# Altium PCB PCB1.PcbDoc
Units mm, origin at the board's own origin, x right, y up, seen from the top; angles counter-clockwise.
Board outline 47.88 x 19.3 mm, 2 copper layers (Top Layer, Bottom Layer); 25 components, 41 nets, 143 pads, 22 vias.
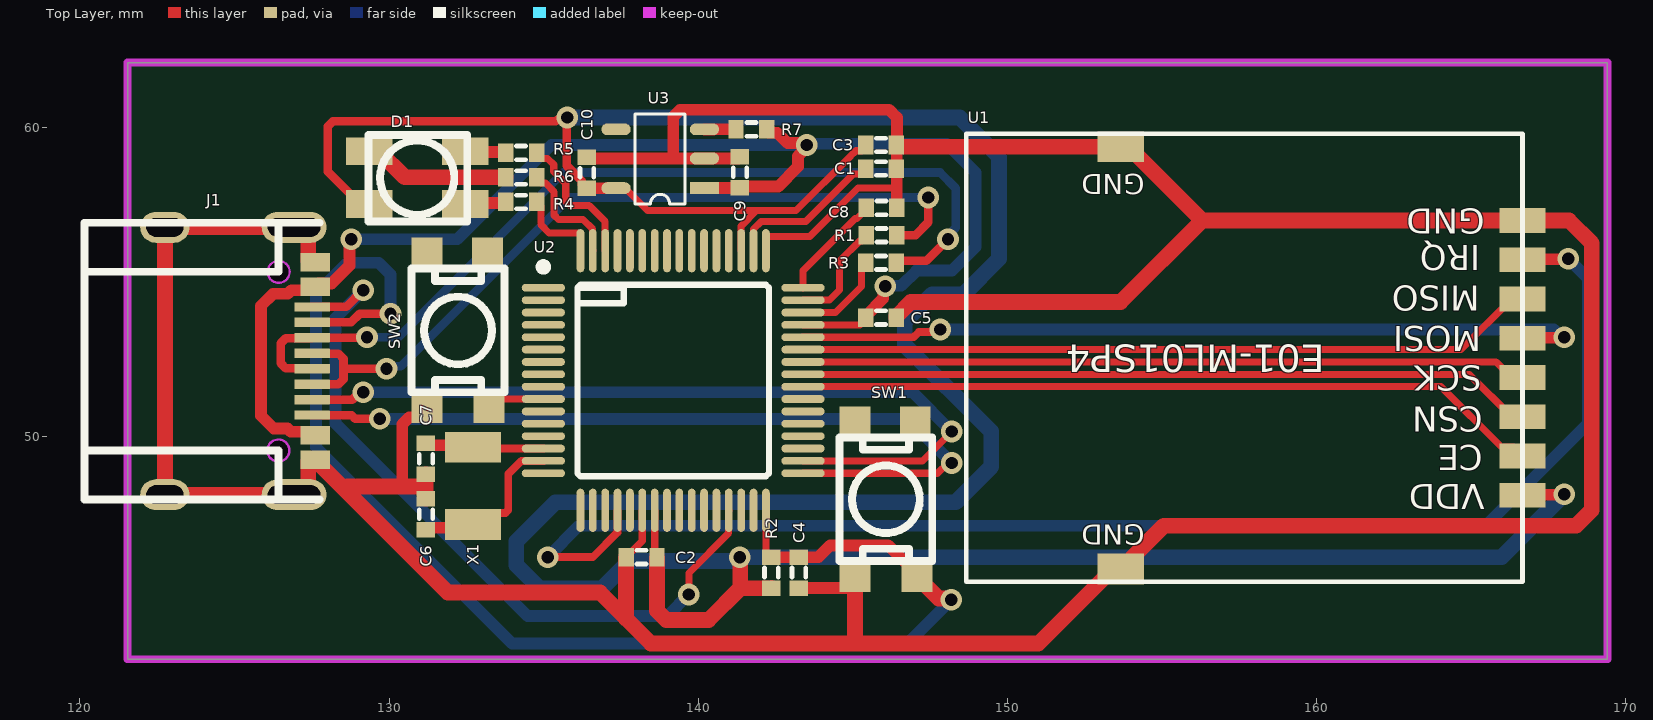
[diagram p0: Top Layer view]
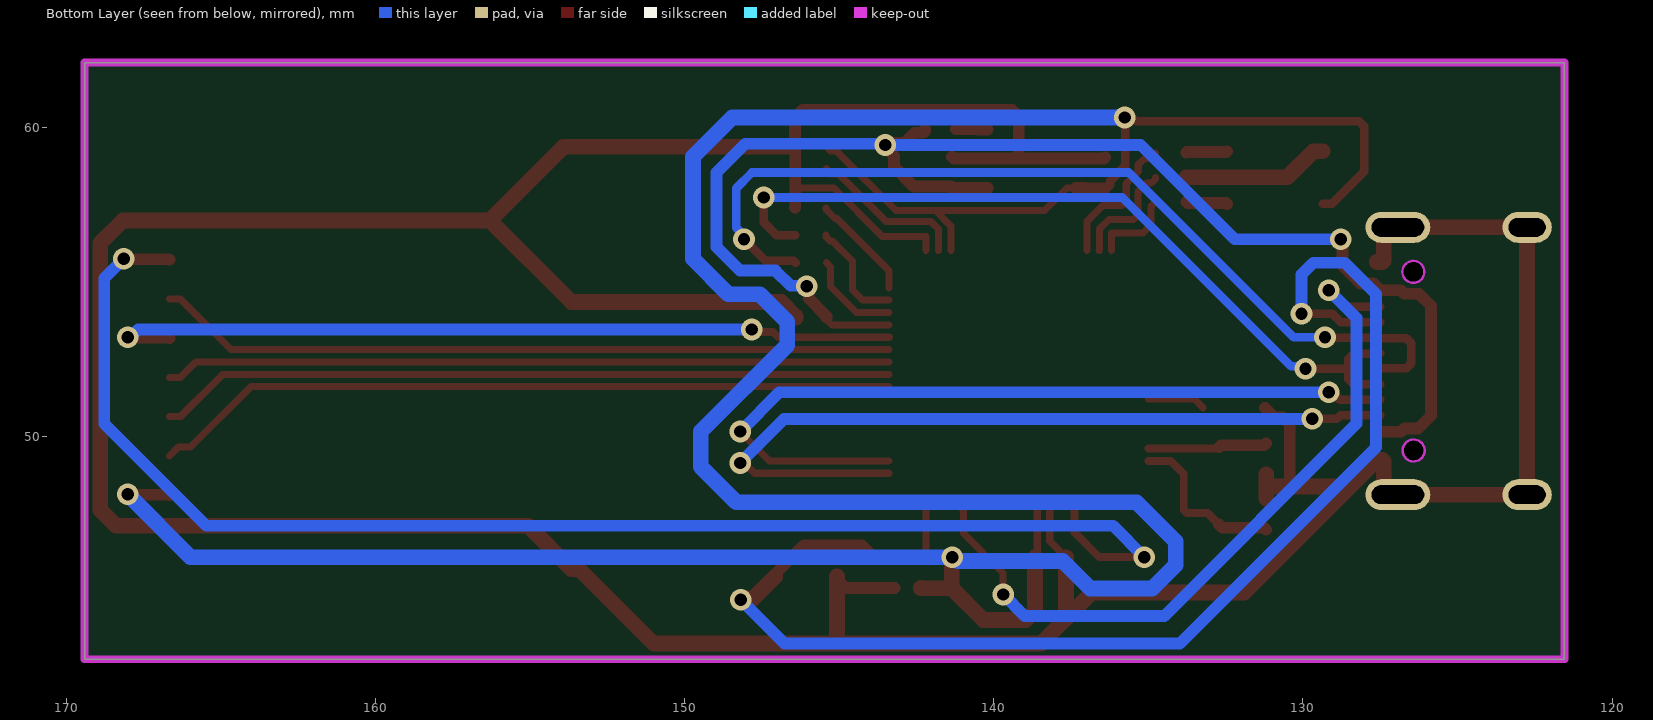
[diagram p1: Bottom Layer view, seen from below]
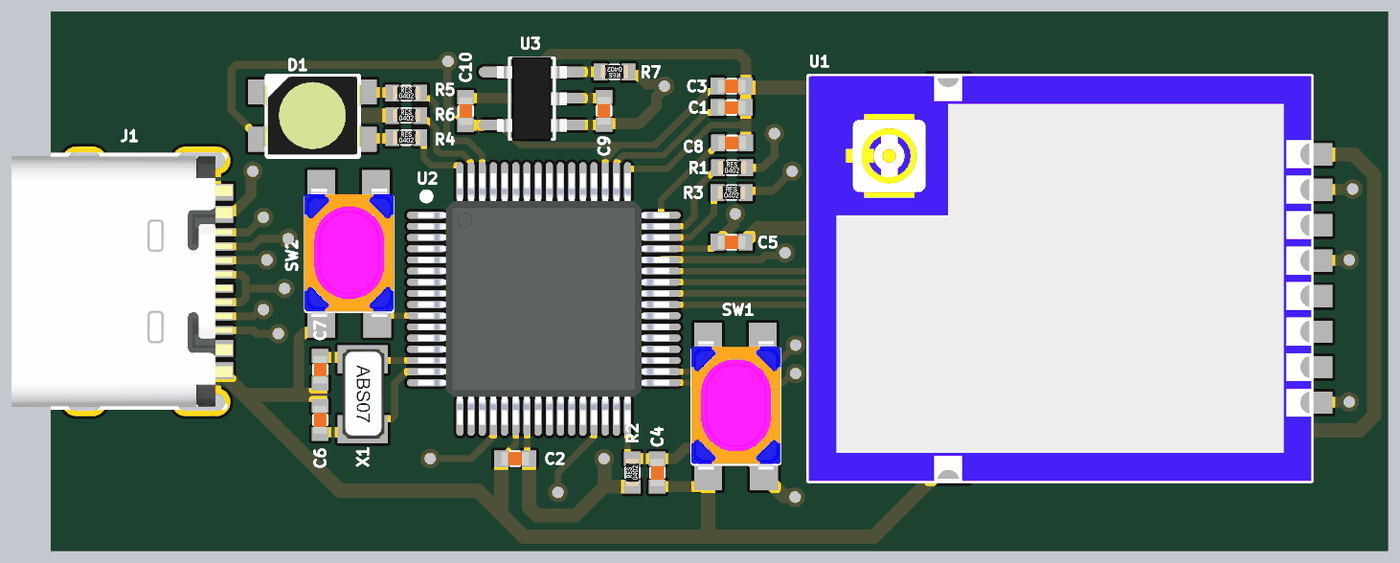
[diagram p2: 3D render of the assembled board from above, using the file's embedded part models]

## Layer stack, top to bottom
Top Solder: solder mask 0.0102, Solder Resist, Dk 3.5
Top Layer: signal copper 0.0356
Dielectric 1: dielectric 0.32, FR-4, Dk 4.8
Bottom Layer: signal copper 0.0356
Bottom Solder: solder mask 0.0102, Solder Resist, Dk 3.5

## Board outline
121.539,42.799 121.539,62.103 169.418,62.103 169.418,42.799

## Design rules (kind name [scope] priority, off if disabled: settings)
Clearance [All] p1: gap=0.127 ignorepadtopadclearanceinfootprint=FALSE
PolygonConnect [All] p1: connectstyle=Relief reliefconductorwidth=0.254 reliefentries=4 polygonreliefangle="90 Angle" airgapwidth=0.254
RoutingVias [All] p1: holewidth=0.711 width=1.27 viastyle="Through Hole" minholewidth=0.4 minwidth=0.7 maxholewidth=0.711 maxwidth=1.27
SolderMaskExpansion [All] p1: expansion=0.102 istentingtop=FALSE
Width [All] p1: maxlimit=0.508 minlimit=0.178 preferedwidth=0.254
30 further rules are at their usual default settings.

## Classes and differential pairs
component class U_Power: C9 C10 R7 U3
net class PB_ADC0_CH[0..4]: PB_ADC0_CH0 PB_ADC0_CH1 PB_ADC0_CH2 PB_ADC0_CH3 PB_ADC0_CH4
component class U_NRF24L01: U1
component class U_M032: C1 C2 C3 C4 C5 C6 C7 C8 R1 R2 R3 SW1 U2 X1
component class Sheet1: D1 J1 R4 R5 R6 SW2

## Components (designator, comment, footprint, x,y, rotation, side; value= is the part's Value field where it differs from the comment)
C1 "Cap" CAP_0402 145.415,58.674 r0 top value=1uF
C2 "Cap" CAP_0402 138.668,46.101 r180 top value=0.1uF
C3 "Cap" CAP_0402 145.415,59.436 r0 top value=0.1uF
C4 "Cap" CAP_0402 143.256,46.101 r270 top value=0.1uf
C5 "Cap" CAP_0402 145.415,53.848 r0 top value=1uF
C6 "Cap" CAP_0402 131.191,46.99 r90 top value=20pF
C7 "Cap" CAP_0402 131.191,49.784 r270 top value=20pF
C8 "Cap" CAP_0402 145.431,57.404 r0 top value=1uF
C9 "Cap" CAP_0402 141.351,58.055 r90 top value=1uf
C10 "Cap" CAP_0402 136.398,58.039 r90 top value=1uf
D1 "RGB" 1411_LED 129.361,57.531 r180 top
J1 "USB TYPE C" USBC-SMD16F 122.748,56.772 r270 top
R1 "Res" RES_0402 145.431,56.515 r0 top value=27
R2 "Res" RES_0402 142.367,45.101 r90 top value=10K
R3 "Res" RES_0402 145.415,55.626 r0 top value=27
R4 "Res" RES_0402 133.773,57.595 r0 top value=1K
R5 "Res" RES_0402 133.773,59.183 r0 top value=1K
R6 "Res" RES_0402 133.773,58.388 r0 top value=1K
R7 "Res" RES_0402 142.224,59.944 r180 top value=100K
SW1 "SPST" "TACK-SW_SMD 2P 4x3mm_2" 147.574,45.974 r180 top
SW2 "SPST" "TACK-SW_SMD 2P 4x3mm_2" 133.731,51.435 r180 top
U1 "NRF24L01" NRF24L01P+PA+LNA+IPX 148.67,45.3 r90 top
U2 "M032SG8AE" MCU_LQFP_64_7x7 139.192,51.816 r0 top
U3 "AP2112K-3.3TRG1" SOT23-5 139.573,57.531 r180 top
X1 "Xtal" X3215 132.715,49.657 r270 top value=32.768KHz

## Footprints (in the part's own frame and the unit in brackets; to place one, negate y for a bottom-side part, rotate by r counter-clockwise, add the part's x,y. Pads: shape width x height; smd on the part's side, far side on the other; paste and mask are expansions set on the pad)
1411_LED [mm]
  rect 1.5x0.9 smd: 1(0,0) 2(0,-1.7) 3(-3.1,0) 4(-3.1,-1.7)
  silkscreen extent -3.17,-2.23 0.03,0.57, body extent -3.3,-2.25 0.2,0.55, height 1.9
CAP_0402 [mm]
  rect 0.5x0.6 smd: 1(0,0) 2(1,0)
  silkscreen extent 0.35,-0.22 0.65,0.22, body extent 0,-0.25 1,0.25, height 0.48
MCU_LQFP_64_7x7 [mm]
  oval 1.4x0.25 smd: 1(-4.2,3) 2(-4.2,2.6) 3(-4.2,2.2) 4(-4.2,1.8) 5(-4.2,1.4) 6(-4.2,1) 7(-4.2,0.6) 8(-4.2,0.2) 9(-4.2,-0.2) 10(-4.2,-0.6) 11(-4.2,-1) 12(-4.2,-1.4) 13(-4.2,-1.8) 14(-4.2,-2.2) 15(-4.2,-2.6) 16(-4.2,-3) 33(4.2,-3) 34(4.2,-2.6) 35(4.2,-2.2) 36(4.2,-1.8) 37(4.2,-1.4) 38(4.2,-1) 39(4.2,-0.6) 40(4.2,-0.2) 41(4.2,0.2) 42(4.2,0.6) 43(4.2,1) 44(4.2,1.4) 45(4.2,1.8) 46(4.2,2.2) 47(4.2,2.6) 48(4.2,3)
  oval 0.25x1.4 smd: 17(-3,-4.2) 18(-2.6,-4.2) 19(-2.2,-4.2) 20(-1.8,-4.2) 21(-1.4,-4.2) 22(-1,-4.2) 23(-0.6,-4.2) 24(-0.2,-4.2) 25(0.2,-4.2) 26(0.6,-4.2) 27(1,-4.2) 28(1.4,-4.2) 29(1.8,-4.2) 30(2.2,-4.2) 31(2.6,-4.2) 32(3,-4.2) 49(3,4.2) 50(2.6,4.2) 51(2.2,4.2) 52(1.8,4.2) 53(1.4,4.2) 54(1,4.2) 55(0.6,4.2) 56(0.2,4.2) 57(-0.2,4.2) 58(-0.6,4.2) 59(-1,4.2) 60(-1.4,4.2) 61(-1.8,4.2) 62(-2.2,4.2) 63(-2.6,4.2) 64(-3,4.2)
  silkscreen extent -4.32,-3.1 3.1,3.8, body extent -4.5,-4.5 4.5,4.5, height 1.55
NRF24L01P+PA+LNA+IPX [mm]
  rect 0.8x1.5 smd: 1(2.805,-18) 2(4.075,-18) 3(5.345,-18) 4(6.615,-18) 5(7.885,-18) 6(9.155,-18) 7(10.425,-18) 8(11.695,-18)
  rect 1x1.5 smd: 9(14.08,-5) 10(0.42,-5)
  silkscreen extent 0,-18 14.5,0, body extent 0,-18 14.5,0, height 2.6
RES_0402 [mm]
  rect 0.5x0.6 smd: 1(0,0) 2(1,0)
  silkscreen extent 0.35,-0.22 0.65,0.22, body extent 0,-0.25 1,0.25, height 0.35
SOT23-5 [mm]
  rect 0.95x0.38 smd: 1(-0.63,-0.51)
  oval 0.95x0.38 smd: 2(-0.63,-1.47) 3(-0.63,-2.41) 4(2.23,-2.41) 5(2.23,-0.51)
  silkscreen extent 0,-2.91 1.61,0, body extent -0.44,-2.95 2.06,0.05, height 1.09
"TACK-SW_SMD 2P 4x3mm_2" [mm]
  rect 1x1 smd: 1(0.5,0.5) 1(0.55,-4.5) 2(2.5,0.5) 2(2.5,-4.5)
  silkscreen extent 0,-4 3,0, body extent -0.1,-4.33 3.1,0.26, height 2.5
USBC-SMD16F [mm]
  rect 0.6x0.95 smd: 1(1.125,4.86) 2(1.925,4.86) 11(6.725,4.86) 12(7.525,4.86)
  rect 0.3x1.15 smd: 3(2.575,4.76) 4(3.075,4.76) 5(3.575,4.76) 6(4.075,4.76) 7(4.575,4.76) 8(5.075,4.76) 9(5.575,4.76) 10(6.075,4.76)
  oval 1x2.1 hole 0.6 slot 1.7 at 90 deg: ""(0,4.18) ""(8.65,4.18)
  oval 1x1.6 hole 0.6 slot 1.2 at 90 deg: ""(0,0) ""(8.65,0)
  Keep-Out Layer board cut-out: 6.864,3.67 6.891,3.534 6.969,3.419 7.084,3.341 7.22,3.314 7.22,3.314 7.356,3.341 7.471,3.419 7.549,3.534 7.576,3.67 7.576,3.67 7.549,3.806 7.471,3.921 7.356,3.999 7.22,4.026 7.22,4.026 7.084,3.999 6.969,3.921 6.891,3.806 6.864,3.67
  Keep-Out Layer board cut-out: 1.44,3.324 1.304,3.351 1.189,3.429 1.111,3.544 1.084,3.68 1.084,3.68 1.111,3.816 1.189,3.931 1.304,4.009 1.44,4.036 1.44,4.036 1.576,4.009 1.691,3.931 1.769,3.816 1.796,3.68 1.796,3.68 1.769,3.544 1.691,3.429 1.576,3.351 1.44,3.324
  Keep-Out Layer circle w0.076: c1.44,3.68 r0.356
  Keep-Out Layer circle w0.076: c7.22,3.67 r0.356
  silkscreen extent -0.15,-2.6 8.8,5, body extent -0.15,-2.6 8.8,5.3, height 3.16
X3215 [mm]
  rect 1x1.8 smd: 1(0,0) 2(2.5,0)
  body extent -0.38,-0.74 2.84,0.78, height 0.91

## Part data
D1: library part LED_1411
J1: "USB Shielded I/O Receptacle; Type C; Right Angle; Surface Mount; Gold over Nickel", Case/Package=0101, Current Rating=5A, Flammability Rating="UL94 V-0", Insulation Color=Black, Manufacturer=Molex, Manufacturer Part Number=105450-0101, Max Operating Temperature=85°C, Min Operating Temperature=-30°C, Supplier Part Number 1=WM12856DKR-ND, Category=Connectors, ComponentLink1Description=http://www.farnell.com/datasheets/2801634.pdf?src-supplier=Farnell, ComponentLink1URL=http://www.farnell.com/datasheets/2801634.pdf?src-supplier=Farnell, ComponentLink2Description=http://www.farnell.com/datasheets/2672741.pdf?src-supplier=Newark, ComponentLink2URL=http://www.farnell.com/datasheets/2672741.pdf?src-supplier=Newark, ComponentLink3Description=http://www.farnell.com/datasheets/2015275.pdf?src-supplier=Element14, ComponentLink3URL=http://www.farnell.com/datasheets/2015275.pdf?src-supplier=Element14, ComponentLink4Description=https://www.molex.com/pdm_docs/ps/PS-105448-001.pdf?src-supplier=Digi-Key, ComponentLink4URL=https://www.molex.com/pdm_docs/ps/PS-105448-001.pdf?src-supplier=Digi-Key, ComponentLink5Description=http://www.farnell.com/datasheets/2801634.pdf?src-supplier=Newark, ComponentLink5URL=http://www.farnell.com/datasheets/2801634.pdf?src-supplier=Newark, ComponentLink6Description=https://www.molex.com/pdm_docs/sd/1054500101_sd.pdf?src-supplier=Digi-Key, ComponentLink6URL=https://www.molex.com/pdm_docs/sd/1054500101_sd.pdf?src-supplier=Digi-Key, ComponentLink7Description=http://www.farnell.com/datasheets/2801634.pdf?src-supplier=Element14, ComponentLink7URL=http://www.farnell.com/datasheets/2801634.pdf?src-supplier=Element14, ComponentLink8Description=http://www.literature.molex.com/SQLImages/kelmscott/Molex/PDF_Images/987651-4081.PDF?src-supplier=Avnet, ComponentLink8URL=http://www.literature.molex.com/SQLImages/kelmscott/Molex/PDF_Images/987651-4081.PDF?src-supplier=Avnet, ComponentLink9Description=http://www.literature.molex.com/SQLImages/kelmscott/Molex/PDF_Images/987651-4081.PDF?src-supplier=Avnet+Asia, ComponentLink9URL=http://www.literature.molex.com/SQLImages/kelmscott/Molex/PDF_Images/987651-4081.PDF?src-supplier=Avnet+Asia, Connector Type=USB, Contact Material="Copper Alloy", Contact Plating=Gold, Features=Shielded, Gender=Receptacle, Housing Material=Thermoplastic, Length=8.94mm, Mating Cycles=10000, Mount="Surface Mount,Through Hole,Horizontal", Number of Contacts=24, Number of Pins=24, Number of Ports=1, Number of Terminals=24, Orientation="Right Angle", Packaging="Tape and Reel", Pitch=0.5mm, Pricing 1="1=2.15000, 10=1.94900, 25=1.82960, 50=1.75000, 100=1.67050, 250=1.51140, 500=1.39208 (USD)", REACH SVHC=Unknown, RoHS=Yes, Shielding=Shielded, Stock 1=21711, Supplier 1=Digi-Key, Termination=Solder, USB Standard="USB 3.1"
SW1 SW2: library part Switch_Button1
U1: library part NRF24L01_module
U3: "IC REG LINEAR 3.3V 600MA SOT23-5", Case/Package=SOT-23-5, Dropout Voltage=250mV, Manufacturer=Diodes, Max Input Voltage=6V, Max Operating Temperature=85°C, Max Output Current=600mA, Min Input Voltage=2.5V, Min Operating Temperature=-40°C, Output Voltage=3.3V, Package Quantity=1, Quiescent Current=55uA, Supplier Part Number 1=AP2112K-3.3TRG1DICT-ND, Accuracy=1.5%, Category="Voltage Regulators - Linear", ComponentLink1Description=https://datasheet.ciiva.com/29569/ap2112-29569919.pdf?src-supplier=Digi-Key, ComponentLink1URL=https://datasheet.ciiva.com/29569/ap2112-29569919.pdf?src-supplier=Digi-Key, ComponentLink2Description=https://datasheet.ciiva.com/30016/ap2112-30016792.pdf?src-supplier=Avnet, ComponentLink2URL=https://datasheet.ciiva.com/30016/ap2112-30016792.pdf?src-supplier=Avnet, ComponentLink3Description=https://datasheet.ciiva.com/29569/ap2112-29569917.pdf?src-supplier=Digi-Key, ComponentLink3URL=https://datasheet.ciiva.com/29569/ap2112-29569917.pdf?src-supplier=Digi-Key, ComponentLink4Description=https://datasheet.ciiva.com/29569/ap2112-29569918.pdf?src-supplier=Digi-Key, ComponentLink4URL=https://datasheet.ciiva.com/29569/ap2112-29569918.pdf?src-supplier=Digi-Key, Height=1.3mm, Lead Free="Lead Free", Length=3.1mm, Manufacturer Part Number=AP2112K-3.3TRG1, Mount="Surface Mount", Number of Outputs=1, Number of Pins=5, Number of Regulators=1, Output Current=600mA, Output Type=Fixed, Packaging="Tape and Reel", Polarity=Positive, Pricing 1="1=0.47000, 10=0.35500, 25=0.32000, 100=0.17450, 250=0.16872, 500=0.15126, 1000=0.11636 (USD)", RoHS=Yes, Stock 1=54786, Supplier 1=Digi-Key, Width=1.7mm

## Via types
v1: diameter 0.7, hole 0.4, Top Layer to Bottom Layer, tented both sides, 22 vias

## Nets (pads, with @x,y where several pads share a name; then routed paths per layer and width w, separated by ;. In a path a pad name is that pad's centre, name@x,y a point inside that pad or via, vN(x,y) a via of type N, cw(c..) or ccw(c..) an arc to the next point about the centre after c; other vN are vias at no path point)
CE: U1.2 U2.40 | length 24.2
  Top Layer w0.229: U2.40 164.03,51.616 165.985,49.661 166.384,49.661 U1.2
FP0_ICE_DAT: J1.10 U2.33 | length 26.3
  Top Layer w0.229: U2.33 147.748,48.816 148.081,49.149 v1(148.209,49.149)
  Top Layer w0.279: J1.10 128.786,50.697 128.909,50.573 v1(129.694,50.573)
  Bottom Layer w0.381: v1(129.694,50.573) 146.785,50.573 v1(148.209,49.149)
FP1_ICE_CLK: J1.9 U2.34 | length 26.5
  Top Layer w0.229: U2.34 147.26,49.216 v1(148.209,50.165)
  Top Layer w0.279: J1.9 128.807,51.197 129.045,51.435 v1(129.159,51.435)
  Bottom Layer w0.381: v1(129.159,51.435) 146.939,51.435 v1(148.209,50.165)
GND: C1.2 C2.2 C3.2 C4.2 C5.2 C6.2 C7.2 C8.2 C9.2 C10.2 J1. J1.1 J1.12 SW1.2@145.074,45.474 SW2.2@131.231,50.935 U1.8 U1.9 U1.10 U2.22 U2.49 U3.2 | length 145.8
  Top Layer w0.229: C2.2@137.854,46.287 138.192,46.625 U2.22 ; U2.49 142.192,56.467 142.202,56.477 143.612,56.477 145.175,58.039 146.423,58.039
  Top Layer w0.381: 130.589,48.387 130.429,48.547 130.429,50.402 130.652,50.625 130.921,50.625 SW2.2@131.231,50.935 ; C10.2 136.436,59.001 139.192,59.001 ; C9.2 141.297,59.001 U3.2 139.192,59.001 ; C4.2@143.206,45.101 144.796,45.101 SW1.2@145.074,45.379 ; C1.2 C1.2@146.423,58.674 ; C8.2 146.423,57.412 146.423,58.039 C1.2@146.423,58.674 ; 139.192,59.001 139.192,60.356 139.415,60.579 146.177,60.579 146.431,60.325 146.431,59.452 C3.2 146.423,59.428 C1.2@146.423,58.674
  Top Layer w0.508: J1.1 127.433,55.647 127.387,55.693 127.387,56.545 127.16,56.772 126.928,56.772 122.748,56.772 122.748,48.122 126.928,48.122 127.16,48.122 127.387,48.349 127.387,49.201 127.433,49.247 127.783,49.247 127.829,49.201 127.829,49.026 128.556,48.299 131.897,44.958 136.823,44.958 137.668,44.113 ; 128.643,48.387 130.589,48.387 131.191,48.387 ; C6.2 131.191,48.387 ; C7.2 131.191,48.387 ; C2.2 137.668,44.113 ; SW1.2@145.074,45.474 145.074,45.379 145.074,43.394 145.161,43.307 ; C5.2 146.415,53.89 146.881,54.356 153.666,54.356 156.305,56.995 ; C3.2@146.431,59.452 146.503,59.38 U1.9 153.92,59.38 156.305,56.995 ; 137.668,44.113 138.474,43.307 145.161,43.307 ; 145.161,43.307 151.007,43.307 153.42,45.72 U1.10 155.067,47.117 168.402,47.117 168.91,47.625 168.91,56.261 168.176,56.995 U1.8 156.305,56.995
INT: U1.7 U2.20 | length 45.8
  Top Layer w0.254: v1(135.128,46.101) 136.588,46.101 137.39,46.903 U2.20 U2.20
  Top Layer w0.381: U1.7 166.684,55.739 168.134,55.739 v1(168.148,55.753)
  Bottom Layer w0.381: v1(135.128,46.101) 136.144,47.117 165.481,47.117 168.783,50.419 168.783,55.118 v1(168.148,55.753)
LDO_CAP: C1.1 U2.50 | length 5.2
  Top Layer w0.229: U2.50 141.796,56.02 141.796,56.713 142.04,56.957 143.482,56.957 145.018,58.493 145.279,58.493 145.415,58.629 C1.1
LED_B: R6.2 U2.63 | length 3.7
  Top Layer w0.229: R6.2 134.773,58.338 134.909,58.202 135.057,58.202 135.343,57.916 135.343,57.161 135.477,57.027 136.274,57.027 136.588,56.713 136.588,56.02 U2.63
LED_G: R5.2 U2.62 | length 4.6
  Top Layer w0.229: R5.2 134.773,59.133 134.909,58.997 135.131,58.997 135.329,58.799 135.329,58.578 135.717,58.189 135.717,57.613 135.851,57.48 136.475,57.48 136.992,56.962 U2.62
LED_R: R4.2 U2.64 | length 2.8
  Top Layer w0.229: R4.2 134.909,57.459 134.909,56.861 135.176,56.594 136.182,56.594 136.192,56.584 U2.64
MCU_USB_D+: R1.1 U2.47 | length 3.5
  Top Layer w0.229: U2.47 143.396,54.42 144.25,54.42 144.577,54.747 144.577,55.679 145.227,56.329 145.295,56.329 145.431,56.465 R1.1
MCU_USB_D-: R3.1 U2.46 | length 3.1
  Top Layer w0.229: U2.46 143.396,54.02 144.444,54.02 145.279,54.855 145.279,55.49 R3.1
MCU_VDD: C2.1 C3.1 C10.1 D1.1 R2.1 U1.1 U2.23 U2.51 U3.5 | length 115.5
  Top Layer w0.229: U3.5 137.628,58.041 138.356,57.313 141.893,57.313 ; U2.23 138.596,47.612 138.596,46.173 C2.1 ; U2.51 141.392,56.812 141.893,57.313 ; C3.1 145.415,59.386 145.279,59.25 145.102,59.25 145.067,59.215 145.065,59.215 144.924,59.074 144.924,59.072 143.165,57.313 141.893,57.313
  Top Layer w0.279: D1.1 129.061,57.531 128.016,58.576 128.016,60.034 128.18,60.198 135.389,60.198 135.436,60.245 135.683,60.245 v1(135.763,60.325) ; v1@135.746,60.308 135.746,58.763 136.238,58.272 136.238,58.149 136.348,58.039 C10.1
  Top Layer w0.381: C10.1 137.057,58.039 137.059,58.041 U3.5 ; U1.1 166.684,48.119 168.007,48.119 v1(168.021,48.133)
  Top Layer w0.508: C2.1 138.668,44.367 138.966,44.069 140.335,44.069 141.363,45.097 ; v1(141.351,46.101) 141.363,46.089 141.363,45.097 ; R2.1 142.363,45.097 141.363,45.097
  Bottom Layer w0.508: v1(135.763,60.325) 148.463,60.325 149.733,59.055 149.733,55.753 148.59,54.61 147.574,54.61 146.685,53.721 146.685,52.959 149.479,50.165 149.479,49.022 148.336,47.879 135.382,47.879 134.112,46.609 134.112,45.847 134.874,45.085 136.88,45.085 137.769,45.974 141.172,45.974 141.299,46.101 v1(141.351,46.101) 165.989,46.101 v1(168.021,48.133)
NetD1_2: D1.2 R6.1 | length 4.8
  Top Layer w0.508: D1.2 129.661,59.231 130.504,58.388 R6.1
NetD1_3: D1.3 R4.1 | length 1.3
  Top Layer w0.381: D1.3 132.493,57.563 133.741,57.563 R4.1
NetD1_4: D1.4 R5.1 | length 1.3
  Top Layer w0.381: D1.4 132.485,59.207 133.749,59.207 R5.1
NetR7_2: R7.2 U3.3 | length 1
  Top Layer w0.381: U3.3 140.487,59.941 140.49,59.944 R7.2
nRESET: C4.1 J1.4 R2.2 SW1.1@147.074,45.474 U2.32 | length 43.8
  Top Layer w0.229: R2.2@142.192,46.237 U2.32
  Top Layer w0.279: J1.4 128.771,53.697 129.049,53.975 v1(130.048,53.975)
  Top Layer w0.381: R2.2 C4.1 143.891,46.101 144.272,46.482 146.145,46.482 SW1.1@147.161,45.466
  Top Layer w0.508: SW1.1@147.074,45.474 147.787,44.761 148.152,44.761 v1(148.189,44.724)
  Bottom Layer w0.381: v1(130.048,53.975) 130.048,55.245 129.667,55.626 128.651,55.626 127.635,54.61 127.635,49.657 133.985,43.307 146.772,43.307 v1(148.189,44.724)
PA0_UART0_RXD: U2.30
PA1_UART0_TXD: J1.3 U2.29 | length 24.1
  Top Layer w0.229: v1(139.7,44.895) 139.7,45.593 140.988,46.881 140.988,47.612 U2.29
  Top Layer w0.279: J1.3 128.611,54.197 129.151,54.737 v1(129.159,54.737)
  Bottom Layer w0.381: v1(129.159,54.737) 128.27,53.848 128.27,50.416 134.49,44.196 139.001,44.196 v1(139.7,44.895)
PA4_I2C0_SCL: U2.26
PA5_I2C0_SDA: U2.25
PA6_INT0: U2.21
PA8_IO_V33EN: U2.11
PA9_IO_BTM: SW2.1@133.231,50.935 U2.10 | length 1.9
  Top Layer w0.229: SW2.1@133.231,50.935 133.512,51.216 U2.10
PB14_IO_CHRG: U2.54
PB15_IO_STDBY: U2.53
PB_ADC0_CH0: U2.7
PB_ADC0_CH1: U2.6
PB_ADC0_CH2: U2.5
PB_ADC0_CH3: U2.4
PB_ADC0_CH4: U2.3
PD0_SPI0_MOSI: U1.5 U2.44 | length 26.2
  Top Layer w0.254: U2.44 146.97,53.216 147.136,53.382 147.743,53.382 v1(147.828,53.467)
  Top Layer w0.381: U1.5 166.684,53.199 168.007,53.199 v1(168.021,53.213)
  Bottom Layer w0.381: v1(147.828,53.467) 167.681,53.467 167.935,53.213 v1(168.021,53.213)
PD1_SPI0_MISO: U1.6 U2.43 | length 24
  Top Layer w0.229: U2.43 164.681,52.816 166.32,54.455 U1.6
PD2_SPI0_CLK: U1.4 U2.42 | length 23.5
  Top Layer w0.229: U2.42 165.819,52.416 166.32,51.915 U1.4
PD3_SPI0_SS: U1.3 U2.41 | length 23.8
  Top Layer w0.229: U2.41 164.949,52.016 166.32,50.645 U1.3
PF4_X32_OUT: C6.1 U2.15 X1.2 | length 5.4
  Top Layer w0.254: X1.2 133.088,47.53 133.763,47.53 133.858,47.625 133.858,48.793 134.279,49.214 U2.15 U2.15
  Top Layer w0.381: C6.1 131.25,47.049 132.607,47.049 X1.2
PF5_X32_IN: C7.1 U2.14 X1.1 | length 3.9
  Top Layer w0.254: X1.1 132.756,49.616 U2.14
  Top Layer w0.381: C7.1 131.25,49.725 132.647,49.725 X1.1
USB_CAP: C8.1 U2.48 | length 3.5
  Top Layer w0.229: U2.48 143.392,55.367 145.081,57.056 145.133,57.056 145.431,57.354 C8.1
USB_D+: J1.6 J1.8 R1.2 | length 26
  Top Layer w0.279: J1.8 128.36,51.697 128.524,51.861 128.524,52.192 ; J1.6 127.518,52.687 128.36,52.687 128.524,52.523 128.524,52.192 ; v1(129.916,52.192) 128.524,52.192 ; R1.2 147.029,56.515 147.447,56.933 v1(147.447,57.738)
  Bottom Layer w0.279: v1(129.916,52.192) 129.996,52.272 130.377,52.272 135.843,57.738 v1(147.447,57.738)
USB_D-: J1.5 J1.7 R3.2 | length 29.8
  Top Layer w0.279: J1.7 127.498,52.207 126.656,52.207 126.492,52.371 126.492,53.023 126.656,53.187 127.498,53.187 J1.5 127.516,53.205 129.278,53.205 v1(129.286,53.213) ; R3.2 146.479,55.689 147.383,55.689 v1(148.082,56.388)
  Bottom Layer w0.279: v1(129.286,53.213) 130.302,53.213 135.636,58.547 147.828,58.547 148.336,58.039 148.336,56.756 148.082,56.502 v1(148.082,56.388)
USB_VBUS: C5.1 C9.1 J1.2 J1.11 R7.1 U2.45 U3.1 | length 46.6
  Top Layer w0.229: U2.45 145.233,53.616 145.415,53.798 C5.1
  Top Layer w0.381: J1.11 127.499,50.156 126.819,50.156 126.713,50.263 126.267,50.263 125.857,50.673 125.857,54.229 126.249,54.621 126.723,54.621 126.839,54.737 127.499,54.737 127.718,54.956 128.142,54.956 128.717,55.532 128.717,56.327 v1(128.778,56.388) ; U3.1 141.223,58.04 C9.1@141.224,58.039 ; C9.1@141.401,58.055 C9.1 141.387,58.091 142.591,58.091 143.229,58.73 143.229,59.069 143.51,59.35 v1(143.51,59.436) 143.449,59.497 142.896,59.497 142.558,59.835 142.284,59.835 142.224,59.894 R7.1 ; C5.1 145.415,53.898 145.988,54.471 145.988,54.802 v1(146.049,54.863)
  Bottom Layer w0.381: v1(128.778,56.388) 132.207,56.388 135.255,59.436 v1(143.51,59.436) 143.553,59.479 148.039,59.479 148.971,58.547 148.971,56.134 148.209,55.372 147.066,55.372 146.574,54.88 146.066,54.88 v1(146.049,54.863)
pads on no net: SW1.1@147.024,50.474 SW1.2@145.074,50.474 SW2.1@133.181,55.935 SW2.2@131.231,55.935 U2.1 U2.2 U2.8 U2.9 U2.12 U2.13 U2.16 U2.17 U2.18 U2.19 U2.24 U2.27 U2.28 U2.31 U2.35 U2.36 U2.37 U2.38 U2.39 U2.52 U2.55 U2.56 U2.57 U2.58 U2.59 U2.60 U2.61 U3.4

## Keep-outs
Keep-Out Layer:
  the board outline again, w0.254

## Text inside footprints (layer, text, board x,y; h text height)
U1: Top Overlay "GND" at 165.456,57.365 h0.8 r180; Top Overlay "IRQ" at 165.306,56.185 h0.8 r180; Top Overlay "MISO" at 165.286,54.875 h0.8 r180; Top Overlay "MOSI" at 165.336,53.575 h0.8 r180; Top Overlay "SCK" at 165.356,52.295 h0.8 r180; Top Overlay "CSN" at 165.376,50.975 h0.8 r180; Top Overlay "CE" at 165.376,49.725 h0.8 r180; Top Overlay "VDD" at 165.456,48.465 h0.8 r180; Top Overlay "GND" at 154.441,47.155 h0.65 r180; Top Overlay "GND" at 154.451,58.485 h0.65 r180; Top Overlay "E01-ML01SP4" at 160.271,52.971 h0.9 r180